# Allegro board DPU-REVC1-1.brd
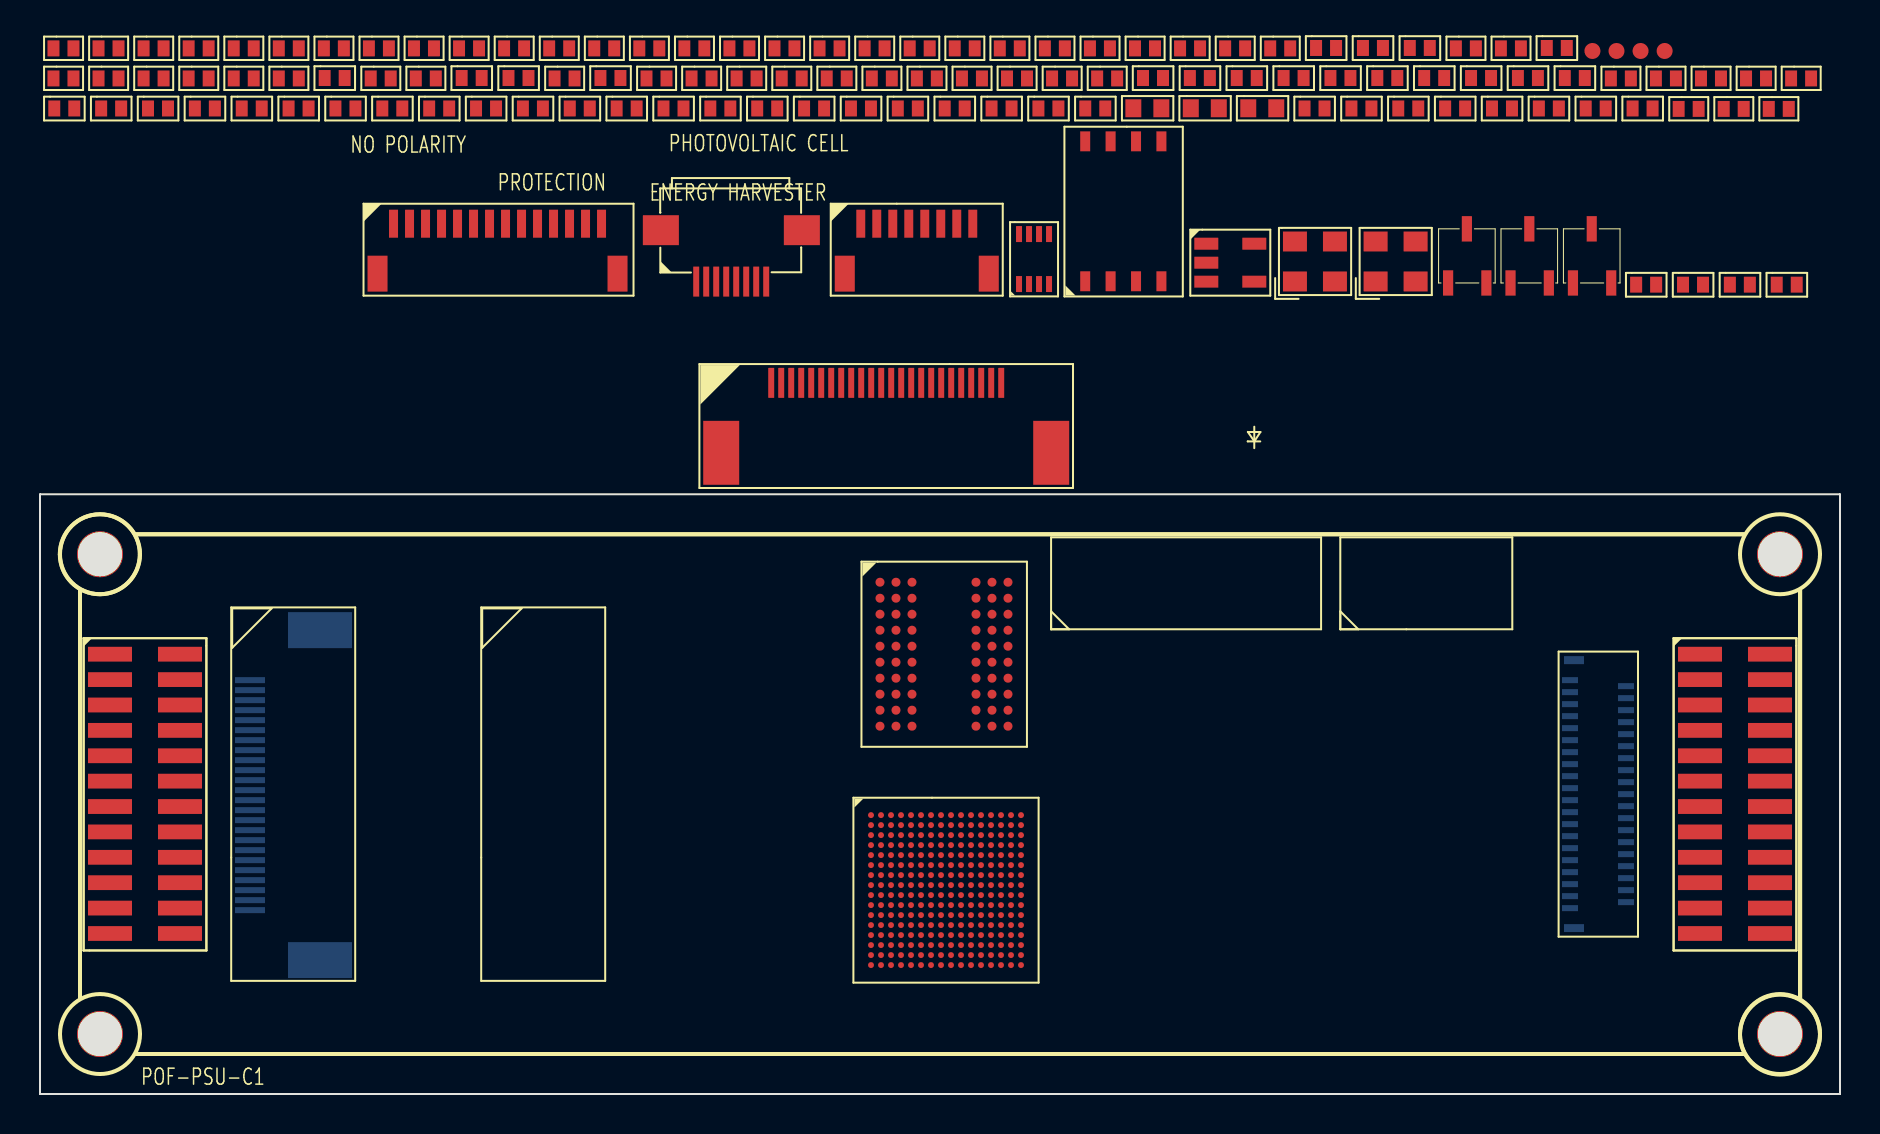
[diagram p0: board, top side]
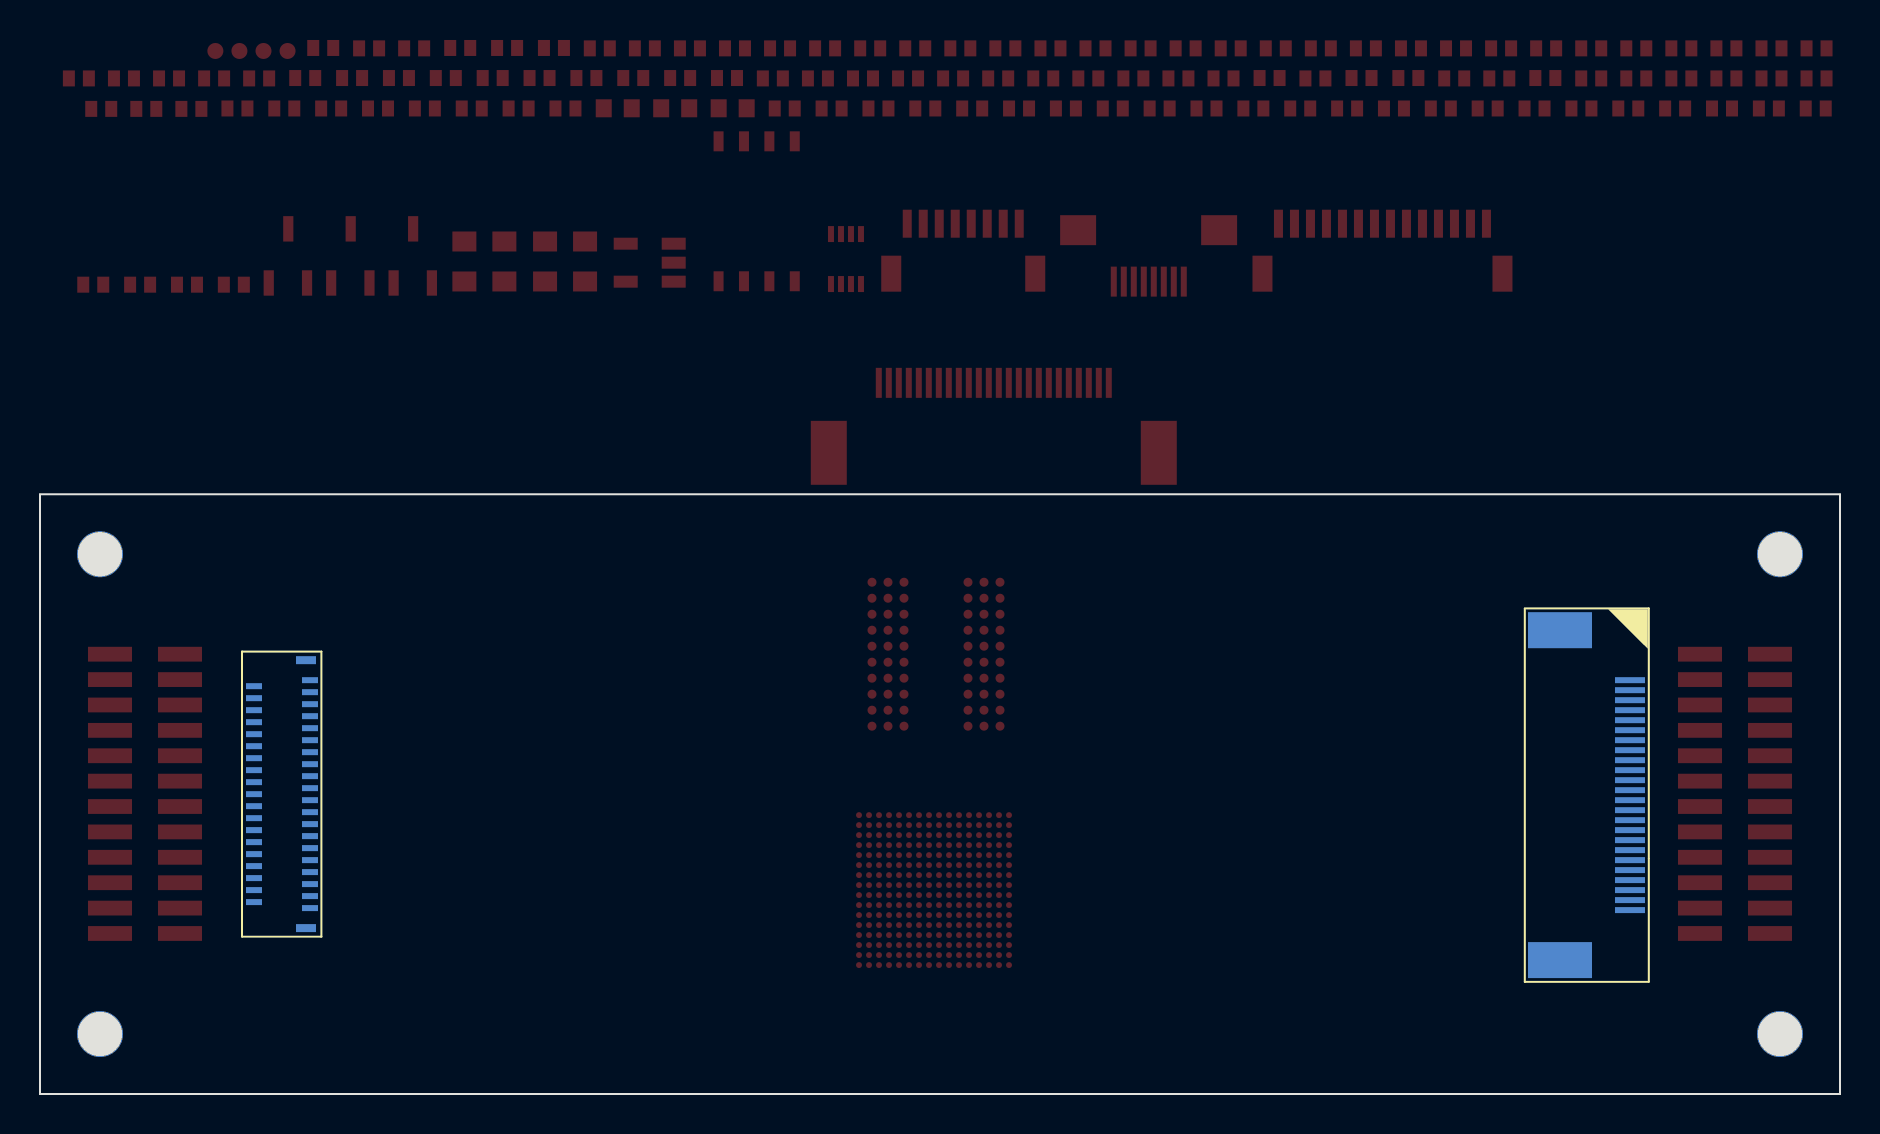
[diagram p1: board, bottom side, seen from below]

Outline 90 x 30 mm; copper layers: TOP, BOTTOM. Coordinates in mm from the lower left corner of the outline.
Outline path: 0,30 90,30 90,0 0,0 0,30

## Design rules (mm)
constraint set DEFAULT: min track width 0.127
net group IO_LED_1: nets IO_LED_1 N987528
net group IO_LED_2: nets IO_LED_2 N987589
net group IO_LED_3: nets IO_LED_3 N1034317
net group MCLK: nets MCLK N900708
net group P2833: nets N762812 P2833
net group SYS_CLK: nets N990230 SYS_CLK
net group UV_PWR_EN: nets N1368839 UV_PWR_EN
net group DVP_MCLK: nets DVP_MCLK MIPI_MCLK N763219

## Placement (name value [footprint] x y rotation side)
C10  0.1uF  [C0402_SMT]  75.34 52.32 0 top
C11  0.1uF  [C0402_SMT]  68.49 52.32 0 top
C12  0.1uF  [C0402_SMT]  66.15 52.32 0 top
C13  0.1uF  [C0402_SMT]  63.8 52.32 0 top
C14  0.1uF  [C0402_SMT]  71.55 50.82 0 top
C22  10uF  [C0603_SMT]  54.67 49.31 0 top
C23  10uF  [C0603_SMT]  57.54 49.31 0 top
C24  0.1uF  [C0402_SMT]  69.21 50.82 0 top
C25  4.7uF  [C0402_SMT]  63.23 49.3 0 top
C26  0.1uF  [C0402_SMT]  66.87 50.82 0 top
C27  4.7uF  [C0402_SMT]  65.57 49.3 0 top
C28  0.1uF  [C0402_SMT]  64.52 50.82 0 top
C29  4.7uF  [C0402_SMT]  67.91 49.3 0 top
C32  0.1uF  [C0402_SMT]  62.18 50.82 0 top
C33  4.7uF  [C0402_SMT]  70.26 49.3 0 top
C36  0.1uF  [C0402_SMT]  59.84 50.82 0 top
C37  4.7uF  [C0402_SMT]  28.02 50.82 0 top
C38  0.1uF  [C0402_SMT]  57.49 50.82 0 top
C39  4.7uF  [C0402_SMT]  73.9 50.82 0 top
C40  0.1uF  [C0402_SMT]  55.15 50.82 0 top
C41  4.7uF  [C0402_SMT]  77.29 49.3 0 top
C42  0.1uF  [C0402_SMT]  14.23 50.82 0 top
C43  0.1uF  [C0402_SMT]  76.24 50.82 0 top
C44  0.1uF  [C0402_SMT]  72.6 49.3 0 top
C45  0.1uF  [C0402_SMT]  45.23 49.3 0 top
C46  0.1uF  [C0402_SMT]  74.94 49.3 0 top
C47  0.1uF  [C0402_SMT]  79.81 40.48 0 top
C49  0.1uF  [C0402_SMT]  82.15 40.48 0 top
C50  0.1uF  [C0402_SMT]  84.49 40.48 0 top
C51  0.1uF  [C0402_SMT]  0.71 49.3 0 top
C52  0.1uF  [C0402_SMT]  86.84 40.48 0 top
C53  0.1uF  [C0402_SMT]  7.74 49.3 0 top
C54  0.1uF  [C0402_SMT]  3.06 49.3 0 top
C55  0.1uF  [C0402_SMT]  5.4 49.3 0 top
C56  0.1uF  [C0402_SMT]  17.12 49.3 0 top
C57  0.1uF  [C0402_SMT]  10.09 49.3 0 top
C58  0.1uF  [C0402_SMT]  12.43 49.3 0 top
C59  0.1uF  [C0402_SMT]  14.77 49.3 0 top
C60  0.1uF  [C0402_SMT]  28.83 49.3 0 top
C61  0.1uF  [C0402_SMT]  19.46 49.3 0 top
C62  0.1uF  [C0402_SMT]  21.8 49.3 0 top
C63  0.1uF  [C0402_SMT]  24.15 49.3 0 top
C64  0.1uF  [C0402_SMT]  26.49 49.3 0 top
C65  4.7uF  [C0402_SMT]  79.63 49.3 0 top
C66  0.1uF  [C0402_SMT]  47.58 49.3 0 top
C67  0.1uF  [C0402_SMT]  31.17 49.3 0 top
C68  0.1uF  [C0402_SMT]  33.52 49.3 0 top
C69  0.1uF  [C0402_SMT]  35.86 49.3 0 top
C70  0.1uF  [C0402_SMT]  38.2 49.3 0 top
C71  0.1uF  [C0402_SMT]  40.55 49.3 0 top
C72  0.1uF  [C0402_SMT]  42.89 49.3 0 top
C73  0.1uF  [C0402_SMT]  21.08 50.82 0 top
C74  0.1uF  [C0402_SMT]  23.43 50.82 0 top
C75  0.1uF  [C0402_SMT]  49.92 49.3 0 top
C76  0.1uF  [C0402_SMT]  52.26 49.3 0 top
C77  10uF  [C0603_SMT]  60.41 49.31 0 top
D11  LED  [LED0402_SMT]  81.93 49.28 0 top
D12  LED  [LED0402_SMT]  84.19 49.28 0 top
D13  LED  [LED0402_SMT]  86.44 49.28 0 top
FB9  BLM18PG121SN1D  [L0402_SMT]  52.86 50.8 0 top
FB10  BLM18PG121SN1D  [L0402_SMT]  0.67 50.8 0 top
FB11  BLM18PG121SN1D  [L0402_SMT]  2.93 50.8 0 top
FB12  BLM18PG121SN1D  [L0402_SMT]  5.18 50.8 0 top
FB13  BLM18PG121SN1D  [L0402_SMT]  7.43 50.8 0 top
FB14  BLM18PG121SN1D  [L0402_SMT]  9.69 50.8 0 top
FB15  BLM18PG121SN1D  [L0402_SMT]  11.94 50.8 0 top
FB16  BLM18PG121SN1D  [L0402_SMT]  70.79 52.3 0 top
FB17  BLM18PG121SN1D  [L0402_SMT]  16.54 50.8 0 top
FB18  BLM18PG121SN1D  [L0402_SMT]  18.79 50.8 0 top
FB19  BLM18PG121SN1D  [L0402_SMT]  73.05 52.3 0 top
FB20  BLM18PG121SN1D  [L0402_SMT]  78.54 50.8 0 top
FB21  BLM18PG121SN1D  [L0402_SMT]  25.73 50.8 0 top
FB22  BLM18PG121SN1D  [L0402_SMT]  61.51 52.3 0 top
FB23  BLM18PG121SN1D  [L0402_SMT]  30.32 50.8 0 top
FB24  BLM18PG121SN1D  [L0402_SMT]  32.58 50.8 0 top
FB25  BLM18PG121SN1D  [L0402_SMT]  34.83 50.8 0 top
FB26  BLM18PG121SN1D  [L0402_SMT]  37.08 50.8 0 top
FB27  BLM18PG121SN1D  [L0402_SMT]  39.34 50.8 0 top
FB28  BLM18PG121SN1D  [L0402_SMT]  41.59 50.8 0 top
FB29  BLM18PG121SN1D  [L0402_SMT]  43.84 50.8 0 top
FB32  BLM18PG121SN1D  [L0402_SMT]  46.1 50.8 0 top
FB33  BLM18PG121SN1D  [L0402_SMT]  48.35 50.8 0 top
FB34  BLM18PG121SN1D  [L0402_SMT]  50.6 50.8 0 top
J1  CONN-1X8  [FPC-0D5-8P]  32.81 40.64 0 top
J2  CONN-24P  [SMD_CONN_2X12P_1D27]  86.5 22 270 top
J3  Hirose FH35C-39S-0.3SHW  [FH35C-39S-0D3SHW]  76.5 15 90 bottom
J4  FPC-05F-24PH20  [FPC-0D5-24P]  10.5 20.7 270 bottom
J8  FPC-05F-24PH20  [FPC-0D5-24P]  36.56 35.57 0 top
J9  CONN-24P  [SMD_CONN_2X12P_1D27]  7 22 270 top
J10  CONN-1X14P-0.8MM  [CONN-1X14P-0D8]  17.68 43.53 0 top
J11  CONN-1X8P-0.8MM  [CONN-1X8P-0D8]  41.04 43.53 0 top
NOREF  -  []  0 30 0 top
NOREF#2  -  [unnamed#2]  3 3 0 top
NOREF#3  -  []  0 0 90 top
NOREF#4  -  [unnamed#2]  87 3 0 top
NOREF#5  -  [unnamed#2]  87 27 0 top
NOREF#6  -  [unnamed#2]  3 27 0 top
Q2  MMBT2222ALT1G  [SOT-23-3]  69.93 40.13 0 top
Q3  MMBT2222ALT1G  [SOT-23-3]  76.17 40.13 0 top
Q4  MMBT2222ALT1G  [SOT-23-3]  73.05 40.13 0 top
R11  10K  [R0402_SMT]  80.8 50.8 0 top
R12  10K  [R0402_SMT]  83.05 50.8 0 top
R13  0R  [R0402_SMT]  7.43 52.3 0 top
R14  DNP  [R0402_SMT]  14.19 52.3 0 top
R17  DNP  [R0402_SMT]  16.45 52.3 0 top
R18  0R  [R0402_SMT]  9.69 52.3 0 top
R19  4.7K  [R0402_SMT]  25.46 52.3 0 top
R21  4.7K  [R0402_SMT]  27.71 52.3 0 top
R22  33  [R0402_SMT]  34.47 52.3 0 top
R23  2.2K  [R0402_SMT]  43.48 52.3 0 top
R24  4.7K  [R0402_SMT]  29.96 52.3 0 top
R25  4.7K  [R0402_SMT]  32.22 52.3 0 top
R26  33  [R0402_SMT]  36.72 52.3 0 top
R52  20K  [R0402_SMT]  45.74 52.3 0 top
R53  20K  [R0402_SMT]  47.99 52.3 0 top
R54  1K  [R0402_SMT]  52.5 52.3 0 top
R55  1K  [R0402_SMT]  54.75 52.3 0 top
R56  0R  [R0402_SMT]  11.94 52.3 0 top
R57  DNP  [R0402_SMT]  18.7 52.3 0 top
R58  33  [R0402_SMT]  38.98 52.3 0 top
R59  100  [R0402_SMT]  59.26 52.3 0 top
R60  10K  [R0402_SMT]  85.3 50.8 0 top
R61  10K  [R0402_SMT]  87.55 50.8 0 top
R62  10K  [R0402_SMT]  0.67 52.3 0 top
R64  1K  [R0402_SMT]  57 52.3 0 top
R65  20K  [R0402_SMT]  50.24 52.3 0 top
R66  10K  [R0402_SMT]  2.93 52.3 0 top
R67  10K  [R0402_SMT]  5.18 52.3 0 top
R68  33  [R0402_SMT]  41.23 52.3 0 top
R69  DNP  [R0402_SMT]  20.95 52.3 0 top
R70  DNP  [R0402_SMT]  23.21 52.3 0 top
TP9  T POINT R  [TP_SMD_CIR_0D8_NP]  77.62 52.17 0 top
TP10  T POINT R  [TP_SMD_CIR_0D8_NP]  81.23 52.17 0 top
TP11  T POINT R  [TP_SMD_CIR_0D8_NP]  80.03 52.17 0 top
TP12  T POINT R  [TP_SMD_CIR_0D8_NP]  78.83 52.17 0 top
U3  GD25Q128ESIGR  [SOP-8-208MIL]  52.26 47.65 0 top
U4  TLV75515PDBVR  [SOT-23-5]  58.31 42.53 0 top
U6  MT46H64M16LF  [VFBGA-60]  45.2 22 0 top
U7  LIFCL-40-BG256  [CSFBGA-256]  45.3 10.2 0 top
U8  CAT25512HU5I-GT3  [UDFN-8-2X3]  48.95 43.01 0 top
Y1  24.0MHz  [SMD2520-4P]  67.78 41.68 0 top
Y2  25.0MHz  [SMD2520-4P]  63.75 41.68 0 top

## Library data of the parts
C10-C14 C24-C29 C32 C33 C36-C47 C49-C76 = CAP NP: signal model: DEFAULT_CAPACITOR_1e+07pF_2_1
C22 C23 C77 = CAP NP: signal model: DEFAULT_CAPACITOR_2.2e+07pF_2_1
D11-D13 = LED
FB9-FB29 FB32-FB34 = INDUCTOR
J1 = CONN-1X8
J2 J9 = CONN-24P
J3 = HiroseFPC_0
J4 = OV5640-FPC-24P-DVP
J8 = OV5640-FPC-24P-MIPI
J10 = CONN-1X14P
J11 = CONN-1X8P
Q2-Q4 = MMBT2222AL
R11-R14 R17-R19 R21-R26 R54-R58 R60-R62 R64 R66-R70 = R: signal model: DEFAULT_RESISTOR_10000OHM_2_1
R52 R53 R59 R65 = R
TP9-TP12 = T POINT R
U3 = GD25Q128ESIGR
U4 = TLV75515PDBVR
U6 = MT48H32M16LFB4-6 ITC
U7 = LIFCL-40-BG256
U8 = CAT25512HU5I-GT3
Y1 Y2 = OSCILLATOR

## Footprints (pads in the part's own frame, mm; a bottom-side part is the same pattern mirrored in y, then rotated)
C0402_SMT
  rect 0.6x0.8 smd: 1(0,0) 2(1,0)
C0603_SMT
  rect 0.8x0.9 smd: 1(0,0) 2(1.4,0)
CONN-1X8P-0D8
  rect 0.45x1.4 smd: 1(0,0) 2(0.8,0) 3(1.6,0) 4(2.4,0) 5(3.2,0) 6(4,0) 7(4.8,0) 8(5.6,0)
  rect 1x1.8 smd: 9(-0.8,-2.5) 10(6.4,-2.5)
CONN-1X14P-0D8
  rect 0.45x1.4 smd: 1(0,0) 2(0.8,0) 3(1.6,0) 4(2.4,0) 5(3.2,0) 6(4,0) 7(4.8,0) 8(5.6,0) 9(6.4,0) 10(7.2,0) 11(8,0) 12(8.8,0) 13(9.6,0) 14(10.4,0)
  rect 1x1.8 smd: 15(11.2,-2.5) 16(-0.8,-2.5)
CSFBGA-256
  round 0.3 smd: A1(-3.75,3.75) A2(-3.25,3.75) A3(-2.75,3.75) A4(-2.25,3.75) A5(-1.75,3.75) A6(-1.25,3.75) A7(-0.75,3.75) A8(-0.25,3.75) A9(0.25,3.75) A10(0.75,3.75) A11(1.25,3.75) A12(1.75,3.75) A13(2.25,3.75) A14(2.75,3.75) A15(3.25,3.75) A16(3.75,3.75) B1(-3.75,3.25) B2(-3.25,3.25) B3(-2.75,3.25) B4(-2.25,3.25) B5(-1.75,3.25) B6(-1.25,3.25) B7(-0.75,3.25) B8(-0.25,3.25) B9(0.25,3.25) B10(0.75,3.25) B11(1.25,3.25) B12(1.75,3.25) B13(2.25,3.25) B14(2.75,3.25) B15(3.25,3.25) B16(3.75,3.25) C1(-3.75,2.75) C2(-3.25,2.75) C3(-2.75,2.75) C4(-2.25,2.75) C5(-1.75,2.75) C6(-1.25,2.75) C7(-0.75,2.75) C8(-0.25,2.75) C9(0.25,2.75) C10(0.75,2.75) C11(1.25,2.75) C12(1.75,2.75) C13(2.25,2.75) C14(2.75,2.75) C15(3.25,2.75) C16(3.75,2.75) D1(-3.75,2.25) D2(-3.25,2.25) D3(-2.75,2.25) D4(-2.25,2.25) D5(-1.75,2.25) D6(-1.25,2.25) D7(-0.75,2.25) D8(-0.25,2.25) D9(0.25,2.25) D10(0.75,2.25) D11(1.25,2.25) D12(1.75,2.25) D13(2.25,2.25) D14(2.75,2.25) D15(3.25,2.25) D16(3.75,2.25) E1(-3.75,1.75) E2(-3.25,1.75) E3(-2.75,1.75) E4(-2.25,1.75) E5(-1.75,1.75) E6(-1.25,1.75) E7(-0.75,1.75) E8(-0.25,1.75) E9(0.25,1.75) E10(0.75,1.75) E11(1.25,1.75) E12(1.75,1.75) E13(2.25,1.75) E14(2.75,1.75) E15(3.25,1.75) E16(3.75,1.75) F1(-3.75,1.25) F2(-3.25,1.25) F3(-2.75,1.25) F4(-2.25,1.25) F5(-1.75,1.25) F6(-1.25,1.25) F7(-0.75,1.25) F8(-0.25,1.25) F9(0.25,1.25) F10(0.75,1.25) F11(1.25,1.25) F12(1.75,1.25) F13(2.25,1.25) F14(2.75,1.25) F15(3.25,1.25) F16(3.75,1.25) G1(-3.75,0.75) G2(-3.25,0.75) G3(-2.75,0.75) G4(-2.25,0.75) G5(-1.75,0.75) G6(-1.25,0.75) G7(-0.75,0.75) G8(-0.25,0.75) G9(0.25,0.75) G10(0.75,0.75) G11(1.25,0.75) G12(1.75,0.75) G13(2.25,0.75) G14(2.75,0.75) G15(3.25,0.75) G16(3.75,0.75) H1(-3.75,0.25) H2(-3.25,0.25) H3(-2.75,0.25) H4(-2.25,0.25) H5(-1.75,0.25) H6(-1.25,0.25) H7(-0.75,0.25) H8(-0.25,0.25) H9(0.25,0.25) H10(0.75,0.25) H11(1.25,0.25) H12(1.75,0.25) H13(2.25,0.25) H14(2.75,0.25) H15(3.25,0.25) H16(3.75,0.25) J1(-3.75,-0.25) J2(-3.25,-0.25) J3(-2.75,-0.25) J4(-2.25,-0.25) J5(-1.75,-0.25) J6(-1.25,-0.25) J7(-0.75,-0.25) J8(-0.25,-0.25) J9(0.25,-0.25) J10(0.75,-0.25) J11(1.25,-0.25) J12(1.75,-0.25) J13(2.25,-0.25) J14(2.75,-0.25) J15(3.25,-0.25) J16(3.75,-0.25) K1(-3.75,-0.75) K2(-3.25,-0.75) K3(-2.75,-0.75) K4(-2.25,-0.75) K5(-1.75,-0.75) K6(-1.25,-0.75) K7(-0.75,-0.75) K8(-0.25,-0.75) K9(0.25,-0.75) K10(0.75,-0.75) K11(1.25,-0.75) K12(1.75,-0.75) K13(2.25,-0.75) K14(2.75,-0.75) K15(3.25,-0.75) K16(3.75,-0.75) L1(-3.75,-1.25) L2(-3.25,-1.25) L3(-2.75,-1.25) L4(-2.25,-1.25) L5(-1.75,-1.25) L6(-1.25,-1.25) L7(-0.75,-1.25) L8(-0.25,-1.25) L9(0.25,-1.25) L10(0.75,-1.25) L11(1.25,-1.25) L12(1.75,-1.25) L13(2.25,-1.25) L14(2.75,-1.25) L15(3.25,-1.25) L16(3.75,-1.25) M1(-3.75,-1.75) M2(-3.25,-1.75) M3(-2.75,-1.75) M4(-2.25,-1.75) M5(-1.75,-1.75) M6(-1.25,-1.75) M7(-0.75,-1.75) M8(-0.25,-1.75) M9(0.25,-1.75) M10(0.75,-1.75) M11(1.25,-1.75) M12(1.75,-1.75) M13(2.25,-1.75) M14(2.75,-1.75) M15(3.25,-1.75) M16(3.75,-1.75) N1(-3.75,-2.25) N2(-3.25,-2.25) N3(-2.75,-2.25) N4(-2.25,-2.25) N5(-1.75,-2.25) N6(-1.25,-2.25) N7(-0.75,-2.25) N8(-0.25,-2.25) N9(0.25,-2.25) N10(0.75,-2.25) N11(1.25,-2.25) N12(1.75,-2.25) N13(2.25,-2.25) N14(2.75,-2.25) N15(3.25,-2.25) N16(3.75,-2.25) P1(-3.75,-2.75) P2(-3.25,-2.75) P3(-2.75,-2.75) P4(-2.25,-2.75) P5(-1.75,-2.75) P6(-1.25,-2.75) P7(-0.75,-2.75) P8(-0.25,-2.75) P9(0.25,-2.75) P10(0.75,-2.75) P11(1.25,-2.75) P12(1.75,-2.75) P13(2.25,-2.75) P14(2.75,-2.75) P15(3.25,-2.75) P16(3.75,-2.75) R1(-3.75,-3.25) R2(-3.25,-3.25) R3(-2.75,-3.25) R4(-2.25,-3.25) R5(-1.75,-3.25) R6(-1.25,-3.25) R7(-0.75,-3.25) R8(-0.25,-3.25) R9(0.25,-3.25) R10(0.75,-3.25) R11(1.25,-3.25) R12(1.75,-3.25) R13(2.25,-3.25) R14(2.75,-3.25) R15(3.25,-3.25) R16(3.75,-3.25) T1(-3.75,-3.75) T2(-3.25,-3.75) T3(-2.75,-3.75) T4(-2.25,-3.75) T5(-1.75,-3.75) T6(-1.25,-3.75) T7(-0.75,-3.75) T8(-0.25,-3.75) T9(0.25,-3.75) T10(0.75,-3.75) T11(1.25,-3.75) T12(1.75,-3.75) T13(2.25,-3.75) T14(2.75,-3.75) T15(3.25,-3.75) T16(3.75,-3.75)
FH35C-39S-0D3SHW
  rect 0.3x0.8 smd: 1(5.7,0) 2(5.4,2.8) 3(5.1,0) 4(4.8,2.8) 5(4.5,0) 6(4.2,2.8) 7(3.9,0) 8(3.6,2.8) 9(3.3,0) 10(3,2.8) 11(2.7,0) 12(2.4,2.8) 13(2.1,0) 14(1.8,2.8) 15(1.5,0) 16(1.2,2.8) 17(0.9,0) 18(0.6,2.8) 19(0.3,0) 20(0,2.8) 21(-0.3,0) 22(-0.6,2.8) 23(-0.9,0) 24(-1.2,2.8) 25(-1.5,0) 26(-1.8,2.8) 27(-2.1,0) 28(-2.4,2.8) 29(-2.7,0) 30(-3,2.8) 31(-3.3,0) 32(-3.6,2.8) 33(-3.9,0) 34(-4.2,2.8) 35(-4.5,0) 36(-4.8,2.8) 37(-5.1,0) 38(-5.4,2.8) 39(-5.7,0)
  rect 0.4x1 smd: 40(6.7,0.2) 41(-6.7,0.2)
FPC-0D5-8P
  rect 0.3x1.5 smd: 1(0,0) 2(0.5,0) 3(1,0) 4(1.5,0) 5(2,0) 6(2.5,0) 7(3,0) 8(3.5,0)
  rect 1.8x1.5 smd: 9(-1.767,2.573) 10(5.283,2.573)
FPC-0D5-24P
  rect 0.3x1.5 smd: 1(0,0) 2(0.5,0) 3(1,0) 4(1.5,0) 5(2,0) 6(2.5,0) 7(3,0) 8(3.5,0) 9(4,0) 10(4.5,0) 11(5,0) 12(5.5,0) 13(6,0) 14(6.5,0) 15(7,0) 16(7.5,0) 17(8,0) 18(8.5,0) 19(9,0) 20(9.5,0) 21(10,0) 22(10.5,0) 23(11,0) 24(11.5,0)
  rect 1.8x3.2 smd: 25(-2.5,-3.5) 26(14,-3.5)
L0402_SMT
  rect 0.6x0.8 smd: 1(0,0) 2(1,0)
LED0402_SMT
  rect 0.6x0.8 smd: 1(0,0) 2(1,0)
R0402_SMT
  rect 0.6x0.8 smd: 1(0,0) 2(1,0)
SMD2520-4P
  rect 1.2x1 smd: 1(-1,-1.04) 2(1,-1.04) 3(1,0.96) 4(-1,0.96)
SMD_CONN_2X12P_1D27
  rect 0.74x2.2 smd: 1(0,-3.5) 2(1.27,-3.5) 3(2.54,-3.5) 4(3.81,-3.5) 5(5.08,-3.5) 6(6.35,-3.5) 7(7.62,-3.5) 8(8.89,-3.5) 9(10.16,-3.5) 10(11.43,-3.5) 11(12.7,-3.5) 12(13.97,-3.5) 13(13.97,0) 14(12.7,0) 15(11.43,0) 16(10.16,0) 17(8.89,0) 18(7.62,0) 19(6.35,0) 20(5.08,0) 21(3.81,0) 22(2.54,0) 23(1.27,0) 24(0,0)
SOP-8-208MIL
  rect 0.5x1 smd: 1(0,-7) 2(1.27,-7) 3(2.54,-7) 4(3.81,-7) 5(3.81,0) 6(2.54,0) 7(1.27,0) 8(0,0)
SOT-23-3
  rect 0.51x1.27 smd: 1(0.476,0.434) 2(2.391,0.434) 3(1.415,3.142)
SOT-23-5
  rect 1.2x0.6 smd: 1(0,0) 2(0,-0.95) 3(0,-1.9) 4(2.4,-1.9) 5(2.4,0)
TP_SMD_CIR_0D8_NP
  round 0.8 smd: 1(0,0)
UDFN-8-2X3
  rect 0.3x0.8 smd: 1(0,-2.5) 2(0.5,-2.5) 3(1,-2.5) 4(1.5,-2.5) 5(1.5,0) 6(1,0) 7(0.5,0) 8(0,0)
unnamed#2
  round 2.3 hole 2.2 unplated: (0,0)
VFBGA-60
  round 0.45 smd: A1(-3.2,3.6) A2(-2.4,3.6) A3(-1.6,3.6) A7(1.6,3.6) A8(2.4,3.6) A9(3.2,3.6) B1(-3.2,2.8) B2(-2.4,2.8) B3(-1.6,2.8) B7(1.6,2.8) B8(2.4,2.8) B9(3.2,2.8) C1(-3.2,2) C2(-2.4,2) C3(-1.6,2) C7(1.6,2) C8(2.4,2) C9(3.2,2) D1(-3.2,1.2) D2(-2.4,1.2) D3(-1.6,1.2) D7(1.6,1.2) D8(2.4,1.2) D9(3.2,1.2) E1(-3.2,0.4) E2(-2.4,0.4) E3(-1.6,0.4) E7(1.6,0.4) E8(2.4,0.4) E9(3.2,0.4) F1(-3.2,-0.4) F2(-2.4,-0.4) F3(-1.6,-0.4) F7(1.6,-0.4) F8(2.4,-0.4) F9(3.2,-0.4) G1(-3.2,-1.2) G2(-2.4,-1.2) G3(-1.6,-1.2) G7(1.6,-1.2) G8(2.4,-1.2) G9(3.2,-1.2) H1(-3.2,-2) H2(-2.4,-2) H3(-1.6,-2) H7(1.6,-2) H8(2.4,-2) H9(3.2,-2) J1(-3.2,-2.8) J2(-2.4,-2.8) J3(-1.6,-2.8) J7(1.6,-2.8) J8(2.4,-2.8) J9(3.2,-2.8) K1(-3.2,-3.6) K2(-2.4,-3.6) K3(-1.6,-3.6) K7(1.6,-3.6) K8(2.4,-3.6) K9(3.2,-3.6)

## Nets
GND: C10.1 C11.1 C12.1 C13.1 C14.2 C22.2 C23.2 C24.1 C25.1 C26.1 C27.1 C28.1 C29.1 C32.1 C33.1 C36.1 C37.1 C38.1 C39.1 C40.1 C41.1 C42.2 C43.2 C44.2 C45.1 C46.1 C47.1 C49.1 C50.1 C51.2 C52.1 C53.1 C54.1 C55.2 C56.2 C57.2 C58.1 C59.1 C60.1 C61.1 C62.1 C63.2 C64.1 C65.1 C66.2 C67.2 C68.2 C69.1 C70.1 C71.1 C72.1 C73.1 C74.1 C75.1 C76.2 C77.1 J1.3 J1.9 J1.10 J2.13 J2.14 J3.4 J3.5 J3.12 J3.30 J3.33 J3.36 J3.39 J3.40 J3.41 J4.2 J4.15 J4.24 J4.25 J4.26 J8.2 J8.15 J8.24 J8.25 J8.26 J9.3 J9.4 J9.7 J9.10 J9.15 J9.18 J9.21 J9.22 J10.3 J10.14 J10.15 J10.16 J11.4 J11.5 J11.6 J11.8 J11.9 J11.10 Q2.2(EMITTER) Q3.2(EMITTER) Q4.2(EMITTER) R14.2 R17.1 R23.2 R57.2 R70.2 U3.4 U4.2 U6.A1 U6.A3 U6.B9 U6.C1 U6.D9 U6.E1 U6.F1 U6.K1 U7.A1 U7.A8 U7.A10 U7.A13 U7.A16 U7.B8 U7.B10 U7.B14(VSSSD#B14) U7.C3 U7.C6 U7.C9 U7.C10 U7.D3 U7.D8 U7.D14 U7.E7 U7.E8 U7.F3 U7.F12 U7.G1 U7.G2 U7.G5 U7.G8 U7.H8 U7.H9 U7.J3 U7.J7 U7.J8 U7.J9 U7.J14 U7.L13 U7.M5 U7.N7 U7.P13 U7.T1 U7.T16 U8.4 Y1.2 Y2.2
P1V5: C13.2 C22.1 C70.2 C74.2 J4.10 J8.10 U4.5(OUT)
A0: U6.J8 U7.P6
A1: U6.J9 U7.P7
A2: U6.K7 U7.L8
A3: U6.K8 U7.L9
A4: U6.K2 U7.N8
A5: U6.K3 U7.N9
A6: U6.J1 U7.M9
A7: U6.J2 U7.M8
A8: U6.J3 U7.R5
A9: U6.H1 U7.P5
A10: U6.J7 U7.R8
A11: U6.H2 U7.P8
A12: U6.H3 U7.T4
A13: U6.F7 U7.P9
BA0: U6.H8 U7.M10
BA1: U6.H9 U7.N10
CAS: U6.G8 U7.P11
CKE: U6.G1 U7.T12
CKN: R59.1 U6.G3 U7.N3
CKP: R59.2 U6.G2 U7.P3
CS: U6.H7 U7.T3
DONE: U7.B16
DPU_UART_RX: J2.1
DPU_UART_TX: J2.2
DQ0: U6.A8 U7.R1
DQ1: U6.B7 U7.R2
DQ2: U6.B8 U7.R3
DQ3: U6.C7 U7.T2
DQ4: U6.C8 U7.R10
DQ5: U6.D7 U7.T10
DQ6: U6.D8 U7.R9
DQ7: U6.E7 U7.T9
DQ8: U6.E3 U7.R4
DQ9: U6.D2 U7.P4
DQ10: U6.D3 U7.T5
DQ11: U6.C2 U7.R6
DQ12: U6.C3 U7.T6
DQ13: U6.B2 U7.R7
DQ14: U6.B3 U7.T7
DQ15: U6.A2 U7.T8
DVP_D0: J4.19 U7.J5
DVP_D1: J4.21 U7.J1
DVP_D2: J4.22 U7.J2
DVP_D3: J4.20 U7.K1
DVP_D4: J4.18 U7.K2
DVP_D5: J4.16 U7.K4
DVP_D6: J4.14 U7.K3
DVP_D7: J4.12 U7.K6
DVP_HSYNC: J4.9 U7.H1
DVP_MCLK: J4.13 R26.2
DVP_PCLK: J4.17 U7.J6
DVP_PWDN: J4.8 U7.H3
DVP_RST: J4.6 U7.H4
DVP_SCL: J4.5 R12.2 U7.H5
DVP_SDA: J4.3 R11.2 U7.H6
DVP_VSYNC: J4.7(VSYNC) U7.H2
FPGA_UART_RX: U7.H16
FPGA_UART_TX: U7.H15
HOLD: R62.2 U7.K12 U8.7
IAM_ALIVE: U7.H14
IAM_ALIVE_EXT: J2.15
INIT_N: U7.D11
IO1: J2.7
IO2: J2.8
IO3: J2.17
IO4: J2.9
IO5: J2.24
IO6: J2.23
IO7: J2.18
IO_LED_1: R54.1 U7.E6
IO_LED_2: R55.1 U7.E4
IO_LED_3: R64.1 U7.E5
IO_P5V0_SHDN: U7.H10
IO_P5V0_SHDN_EXT: J2.10
IR_5V0: FB32.2 J3.1 J3.2 J3.3(VDD50#3)
IR_D0: J3.13 U7.P15
IR_D1: J3.14 U7.P16
IR_D2: J3.15 U7.M14
IR_D3: J3.16 U7.N14
IR_D4: J3.17 U7.N16
IR_D5: J3.18 U7.N15
IR_D6: J3.19 U7.M12
IR_D7: J3.20 U7.M11
IR_D8: J3.21 U7.L11
IR_D9: J3.22 U7.L10
IR_D10: J3.23 U7.M13
IR_D11: J3.24 U7.L12
IR_D12: J3.25 U7.M16
IR_D13: J3.26 U7.M15
IR_HSYNC: J3.28 U7.P14
IR_PCLK: J3.29 U7.R15
IR_UART_RX: J3.6 U7.R16
IR_UART_TX: J3.7 U7.T15
IR_VSYNC: J3.27 U7.N13
JTAG_EN: J1.8 R17.2 R18.2 U7.D10
LD_PWR_EN: U7.H11
LD_PWR_EN_EXT: J2.16
LDM: U6.F8 U7.R13
LDQS: U6.E8 U7.R12
MCLK: R22.1 U7.C16
MCSN: R19.1 U3.1 U7.C15
MD0: U3.5 U7.C14
MD1: U3.2 U7.D16
MD2: U3.3(W#/SIO2) U7.D15
MD3: U3.7 U7.D12
MIPI1_CLK+: J3.31 U7.D1
MIPI1_CLK-: J3.32 U7.D2
MIPI1_D0+: J3.34 U7.E1
MIPI1_D0-: J3.35 U7.E2
MIPI1_D1+: J3.37 U7.C1
MIPI1_D1-: J3.38 U7.C2
MIPI2_CLK+: J8.16 U7.A5
MIPI2_CLK-: J8.18 U7.B5
MIPI2_D0+: J8.20 U7.A4
MIPI2_D0-: J8.22 U7.B4
MIPI2_D1+: J8.12 U7.A6
MIPI2_D1-: J8.14 U7.B6
MIPI_MCLK: J8.13 R68.2
MIPI_PWDN: J8.8
MIPI_RST: J8.6
MIPI_SCL: J8.5 R66.2 U7.L2
MIPI_SDA: J8.3 R67.2 U7.L1
P1012: FB9.2 FB10.2 FB11.2 FB12.2 FB13.2 FB14.2 FB15.2 FB16.1 J9.11 J9.12 J9.13 J9.14
P1818: C12.2 C23.1 C24.2 C25.2 C26.2 C27.2 C28.2 C29.2 C32.2 C33.2 C36.2 C37.2 C38.2 C39.2 C40.2 C41.2 C45.2 C46.2 C47.2 C49.2 C52.2 C54.2 C64.2 C65.2 C66.1 C69.2 C71.2 C75.2 C76.1 C77.2 FB17.2 FB18.1 FB19.1 FB20.1 FB21.1 FB22.1 FB23.1 FB24.1 FB25.1 J1.2 J4.11 J8.11 J9.8 J9.9 J9.16 J9.17 R11.1 R12.1 R18.1 R19.2 R21.1 R24.1 R25.1 R56.2 R60.1 R61.1 R62.1 R66.1 R67.1 U3.8 U4.1 U4.3 U7.B11 U7.B13 U7.C8 U7.D13 U7.E3 U7.F5 U7.F7 U7.F8 U7.F13 U7.G7 U7.J4 U7.J13 U7.K8 U7.K10 U7.M6 U7.N5 U7.N6 U7.P12 U8.8 Y2.4(VCC)
P2833: C14.1 D11.2 D12.2 D13.2 FB26.1 FB27.1 FB28.1 FB29.1 J2.11 J2.12 J9.5 J9.6 J9.19 J9.20 R13.2 Y1.4(VCC)
P3333: FB33.2
P5050: FB32.1 FB34.2 J9.1 J9.2 J9.23 J9.24
PROGRAM_N: J1.1 U7.C12
RAS: U6.G9 U7.P10
SPI1_MISO: J2.20 TP11.1(TP)
SPI1_MOSI: J2.22 TP9.1(TP)
SPI1_NSS: J2.19 TP12.1(TP)
SPI1_SCK: J2.21 TP10.1(TP)
SPI2_MISO: J2.5
SPI2_MOSI: J2.3
SPI2_NSS: J2.6
SPI2_SCK: J2.4
SPI_CS: R60.2 U7.J16 U8.1
SPI_SCK: U7.J15 U8.6
SPI_SI: U7.J12 U8.5
SPI_SO: U7.J11 U8.2
SYS_CLK: R58.2 U7.D4
TCK: J1.7 R23.1 U7.F14
TDI: J1.5 R24.2 U7.F11
TDO: J1.4 R25.2 U7.E14
TMS: J1.6 R21.2 U7.E11
UDM: U6.F2 U7.T13
UDQS: U6.E2 U7.T11
UV_PWR_EN: J11.7 R69.2 R70.1
WE: U6.G7(WE#) U7.R11
WP: R61.2 U7.K11 U8.3(W\P\)
N760129: C10.2 FB26.2 J4.4
N760503: C11.2 FB27.2 J4.23
N762812: R13.1 R14.1 Y1.1
N763219: R26.1 R68.1 Y1.3
N829216: C51.1 FB17.1 U7.L14
N833969: C53.2 FB16.2 U7.C5 U7.C7
N839601: C50.2 FB15.1 U7.A2 U7.C4
N861666: C55.1 FB18.2 U6.A9
N861672: C56.1 FB19.2 U6.K9
N861678: C57.1 FB20.2 U6.F9
N900708: R22.2 U3.6
N918097: C62.2 FB21.2 U6.A7
N918103: C61.2 FB22.2 U6.B1
N918109: C60.2 FB23.2 U6.C9
N918115: C59.2 FB24.2 U6.D1
N918127: C58.2 FB25.2 U6.E9
N919655: C63.1 FB9.1 U7.B15
N987486: D11.1(CATHODE) R52.2
N987506: Q2.3 R52.1
N987528: Q2.1 R54.2
N987589: Q3.1 R55.2
N989242: Q3.3 R53.1
N989272: D12.1(CATHODE) R53.2
N990170: R56.1 R57.1 Y2.1
N990230: R58.1 Y2.3
N991860: C42.1 FB10.1 U7.J10
N991866: C44.1 FB11.1 U7.D9
N991872: C43.1 FB12.1 U7.D7
N991878: C67.1 FB13.1 U7.H7
N991884: C68.1 FB14.1 U7.K9
N1034317: Q4.1 R64.2
N1034392: Q4.3 R65.1
N1034422: D13.1(CATHODE) R65.2
N1052103: C72.2 FB29.2 J8.23
N1052756: C73.2 FB28.2 J8.4
N1368839: FB33.1 FB34.1 J11.1 J11.2 J11.3(VBAT+#3) R69.1

Pads without a net: J3 8 9 10 11; J4 1; J8 1 7 9 17 19 21; J10 1 2 4 5 6 7 8 9 10 11 12 13; U4 4; U6 F3; U7 A3 A7 A9 A11 A12 A14 A15 B1 B2 B3 B7 B9 B12 C11 C13 D5 D6 E9 E10 E12 E13 E15 E16 F1 F2 F4 F6 F9 F10 F15 F16 G3 G4 G6 G9 G10 G11 G12 G13 G14 G15 G16 H12 H13 K5 K7 K13 K14 K15 K16 L3 L4 L5 L6 L7 L15 L16 M1 M2 M3 M4 M7 N1 N2 N4 N11 N12 P1 P2 R14 T14

## Text on the board
Ref Des/Silkscreen Top: POF-PSU-C1 | NO POLARITY | PROTECTION | ENERGY HARVESTER | PHOTOVOLTAIC CELL | 4 LAYERS PCB STACK, 1.0mm THINKNESS, NO IMPEDANCE MATCH DEMAND. | ANY QUESTIONS PLEASE CONTACT ME: +8613522296239
